# Altium PCB FSR Current-to-Voltage Converter.PcbDoc
Units mm, origin at the board's own origin, x right, y up, seen from the top; angles counter-clockwise.
Board outline 30.1 x 24.64 mm, 2 copper layers (Top Layer, Bottom Layer); 9 components, 14 nets, 50 pads, 0 vias.
Unrouted connection lines stored in the file: 1.
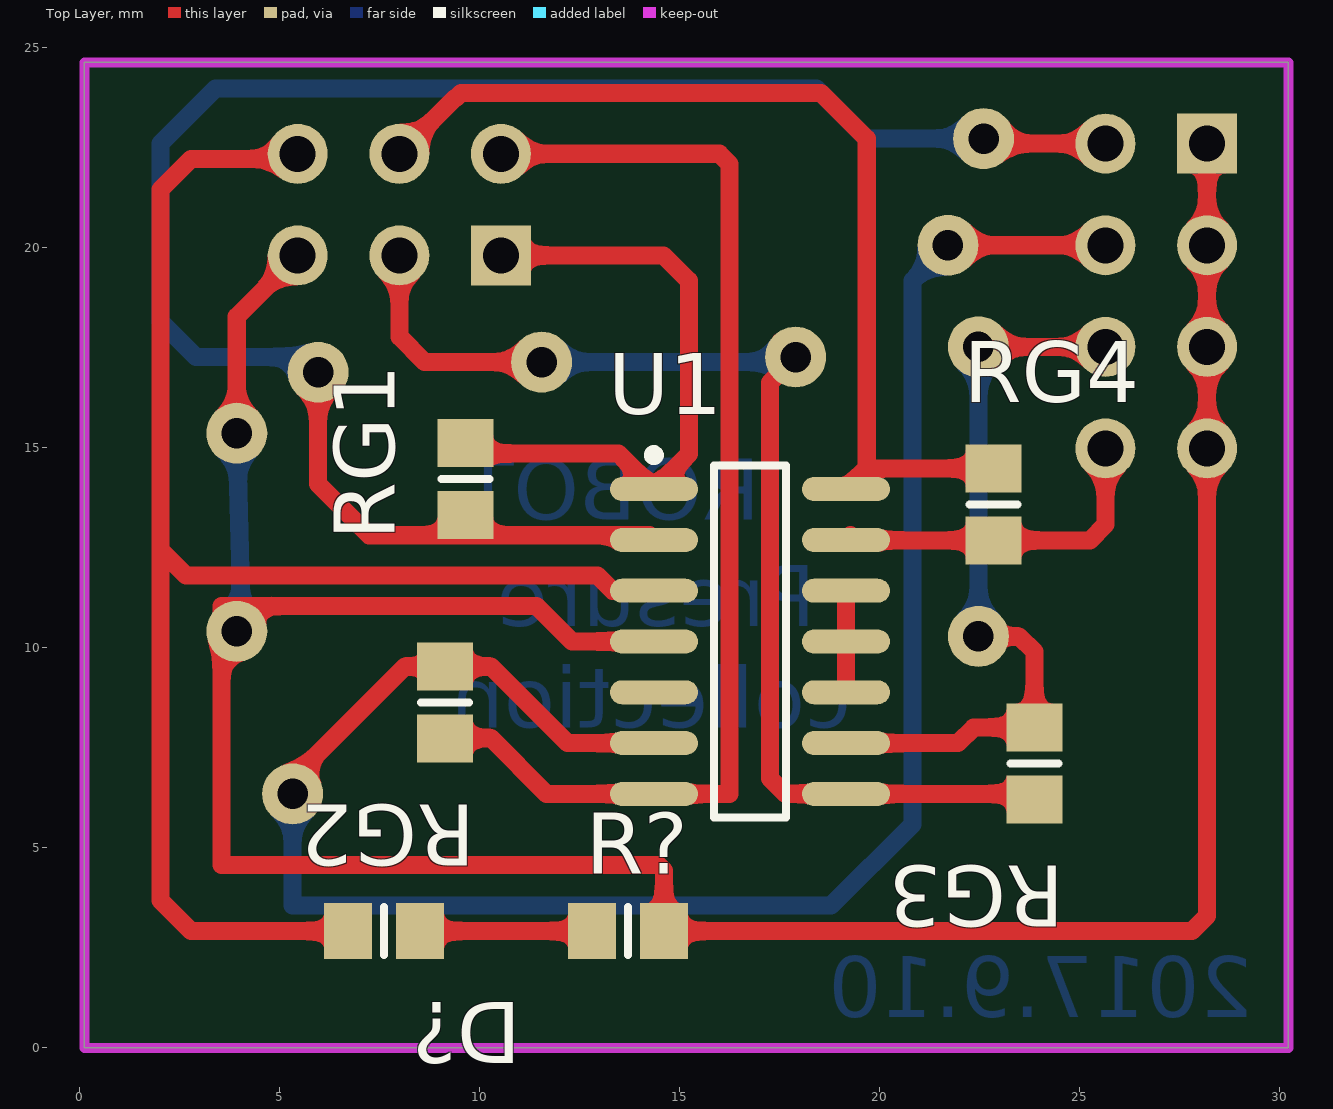
[diagram p0: Top Layer view]
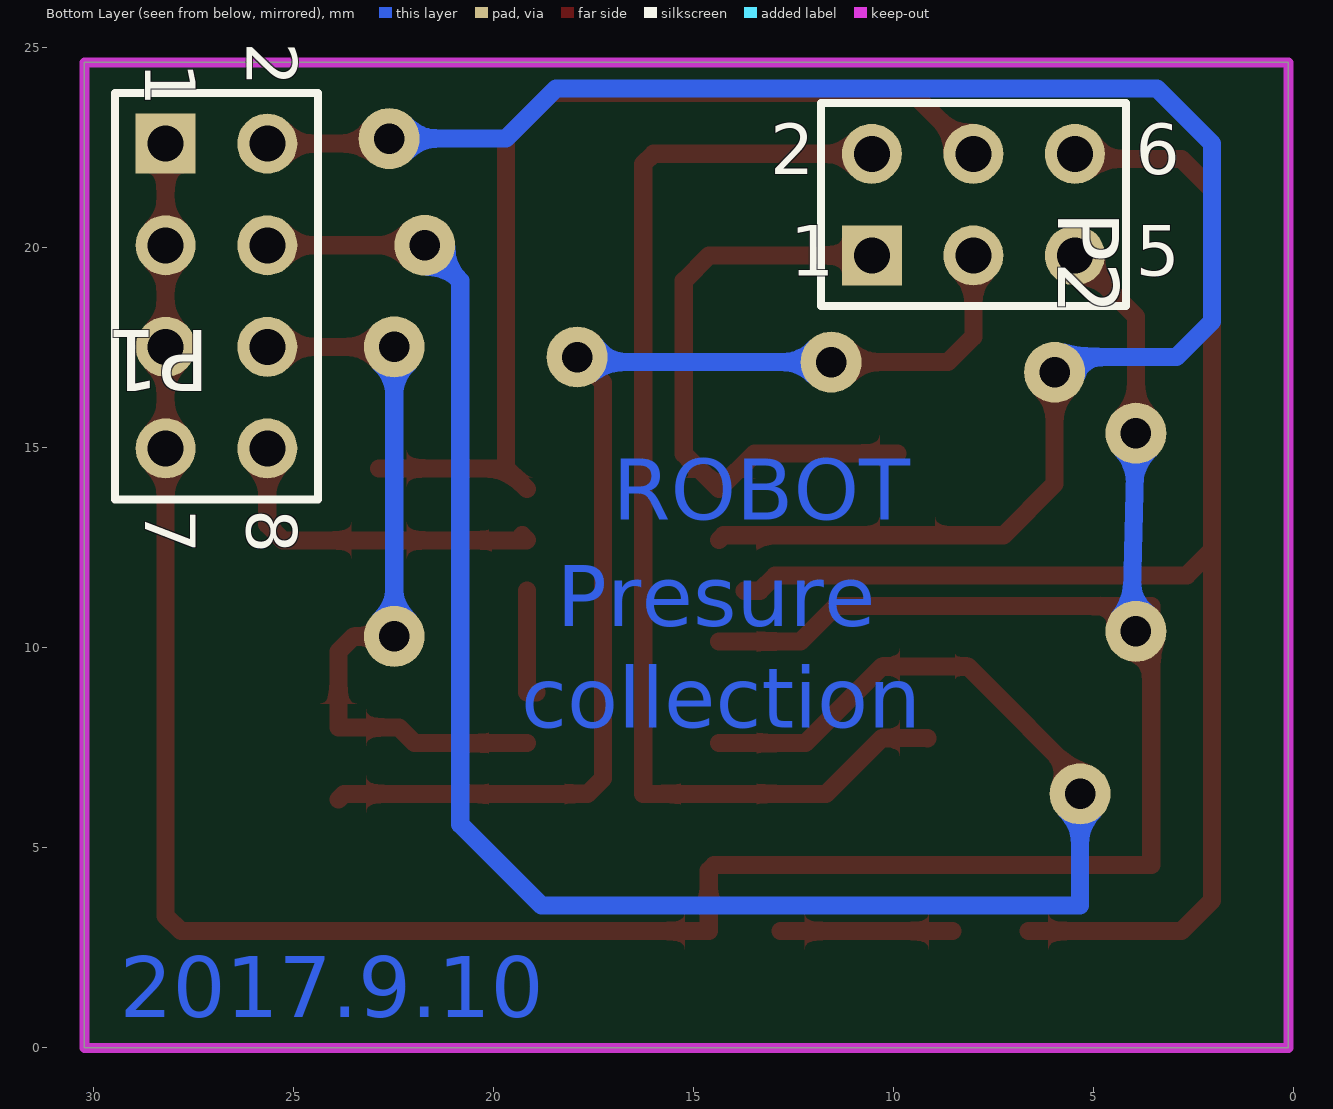
[diagram p1: Bottom Layer view, seen from below]

## Layer stack, top to bottom
Top Solder: solder mask 0.0102, Solder Resist, Dk 3.5
Top Layer: signal copper 0.0356
Dielectric1: dielectric 0.32, FR-4, Dk 4.8
Bottom Layer: signal copper 0.0356
Bottom Solder: solder mask 0.0102, Solder Resist, Dk 3.5

## Board outline
0.127,0 30.226,0 30.226,24.638 0.127,24.638

## Design rules (kind name [scope] priority, off if disabled: settings)
Clearance [All] p1: gap=0.3 ignorepadtopadclearanceinfootprint=FALSE except(0: Arc-Hole Track-Hole SMDPad-Hole THPad-Hole Via-Hole Fill-Hole Poly-Hole Region-Hole Text-Hole)
PasteMaskExpansion [All] p1: expansion=0.1
PolygonConnect [All] p1: connectstyle=Relief reliefconductorwidth=0.254 reliefentries=4 polygonreliefangle="90 Angle" airgapwidth=0.254
RoutingVias [All] p1: holewidth=0.711 width=1.27 viastyle="Through Hole" minholewidth=0.711 minwidth=1.27 maxholewidth=0.711 maxwidth=1.27
SilkToSolderMaskClearance SilkscreenOverComponentPads [IsPad] p1: minsilkscreentomaskgap=0.254 clearancetoexposedcopper=TRUE
SolderMaskExpansion [All] p1: expansion=0.216
Width [All] p1: maxlimit=0.64 minlimit=0.454 preferedwidth=0.554
28 further rules are at their usual default settings.

## Classes and differential pairs
component class "FSR Current-to-Voltage Converter": D? P1 R? RG1 RG2 RG3 RG4 U1

## Components (designator, comment, footprint, x,y, rotation, side; value= is the part's Value field where it differs from the comment)
D? "LED3" 6-0805_N 7.62,2.921 r180 top
P1 "FOOT" HDR2X4 28.194,22.606 r270 bottom
P2 "foot" HDR2X3 10.541,19.812 r180 bottom
R? "Res3" 6-0805_N 13.716,2.921 r0 top value=1K
RG1 "RES" 6-0805_N 9.652,14.224 r90 top value=4.7K
RG2 "RES" 6-0805_N 9.144,8.636 r270 top value=4.7K
RG3 "RES" 6-0805_N 23.876,7.112 r270 top value=4.7K
RG4 "RES" 6-0805_N 22.86,13.589 r90 top value=4.7K
U1 "LM324AD" SO14_N 16.764,10.16 r0 top

## Footprints (in the part's own frame and the unit in brackets; to place one, negate y for a bottom-side part, rotate by r counter-clockwise, add the part's x,y. Pads: shape width x height; smd on the part's side, far side on the other; paste and mask are expansions set on the pad)
6-0805_N [mm] "Chip Resistor, Body 2.0x1.2mm, IPC Medium Density"
  rect 1.2x1.4 smd: 1(-0.9,0) 2(0.9,0)
  silkscreen extent 0,-0.6 0,0.6, body extent -1.07,-0.7 1.07,0.7, height 0.7
HDR2X3 [mm] "Connector; Header; 3x2 Position"
  rect 1.5x1.5 hole 0.9: 1(0,0)
  round 1.5 hole 0.9: 2(0,2.54) 3(2.54,0) 4(2.54,2.54) 5(5.08,0) 6(5.08,2.54)
  silkscreen extent -1.27,-1.27 6.35,3.81
HDR2X4 [mm] "Connector; Header; 4x2 Position"
  rect 1.5x1.5 hole 0.9: 1(0,0)
  round 1.5 hole 0.9: 2(0,2.54) 3(2.54,0) 4(2.54,2.54) 5(5.08,0) 6(5.08,2.54) 7(7.62,0) 8(7.62,2.54)
  silkscreen extent -1.27,-1.27 8.89,3.81
SO14_N [mm] "SOIC, 14-Leads, Body 8.7x3.9mm, Pitch 1.27mm, IPC Medium Density"
  oval 2.2x0.6 smd: 1(-2.4,3.81) 2(-2.4,2.54) 3(-2.4,1.27) 4(-2.4,0) 5(-2.4,-1.27) 6(-2.4,-2.54) 7(-2.4,-3.81) 8(2.4,-3.81) 9(2.4,-2.54) 10(2.4,-1.27) 11(2.4,0) 12(2.4,1.27) 13(2.4,2.54) 14(2.4,3.81)
  silkscreen extent -2.52,-4.4 0.9,4.78, body extent -1.95,-4.33 1.95,4.33, height 1.75

## Part data
D?: "Typical BLUE SiC LED", DatasheetVersion=16-Apr-2002, LatestRevisionDate=17-Dec-2003, LatestRevisionNote="PCB Footprint replaced.", PackageReference=3.5X2.8X1.9, PackageVersion=16-Apr-2002, Published=8-Jun-2000, Publisher="Altium Limited"
P1: library part "Header 4X2", "Header, 4-Pin, Dual row", LatestRevisionDate=17-Jul-2002, LatestRevisionNote="Re-released for DXP Platform.", Publisher="Altium Limited"
P2: library part "Header 3X2", "Header, 3-Pin, Dual row", LatestRevisionDate=17-Jul-2002, LatestRevisionNote="Re-released for DXP Platform.", Publisher="Altium Limited"
R?: "Resistor", LatestRevisionDate=29-May-2009, LatestRevisionNote="IPC-7351 Footprint Added.", PackageDescription="Chip Resistor", PackageReference=J1-0603, Published=8-Jun-2000, Publisher="Altium Limited"
RG1 RG2 RG3 RG4: library part Res3, "Resistor", LatestRevisionDate=29-May-2009, LatestRevisionNote="IPC-7351 Footprint Added.", PackageDescription="Chip Resistor", PackageReference=J1-0603, Published=8-Jun-2000, Publisher="Altium Limited"
U1: "Low-Power Quad Operational Amplifier", Code_IPC=SOIC127P600-14, ComponentLink1Description="Manufacturer Link", ComponentLink1URL=http://www.st.com/, ComponentLink2Description=Datasheet, ComponentLink2URL=http://www.st.com/stonline/products/literature/ds/4797/lm224a.pdf, DatasheetVersion=Nov-1997, LatestRevisionDate=13-Apr-2006, LatestRevisionNote="IPC-7351 Footprint Added.", PackageDescription="14-Pin Small Outline Integrated Circuit 1.27 mm Pitch", PackageReference=SO14, PackageVersion=Sep-1998, Published=24-Aug-2001, Publisher="Altium Limited"

## Free pads (board coordinates)
  round 1.524 hole 0.762: 2(11.557,17.145) 3(17.907,17.272) 4(22.479,17.526) 5(22.479,10.287) 6(3.937,15.367) 7(3.937,10.414) 8(5.334,6.35) 9(21.717,20.066) 10(22.606,22.733) 12(5.969,16.891)

## Nets (pads, with @x,y where several pads share a name; then routed paths per layer and width w, separated by ;. In a path a pad name is that pad's centre, name@x,y a point inside that pad or via, vN(x,y) a via of type N, cw(c..) or ccw(c..) an arc to the next point about the centre after c; other vN are vias at no path point)
FOOT_1: P1.2 pad.10 pad.12 RG1.1 U1.2 | length 44.5
  Top Layer w0.454: pad.12 5.969,14.097 7.25,12.816 14.248,12.816 U1.2 ; pad.10@22.86,22.606 P1.2
  Bottom Layer w0.454: pad.12@5.461,17.272 2.921,17.272 2.032,18.161 2.032,22.606 3.41,23.984 18.434,23.984 19.685,22.733 pad.10
FOOT_2: P1.4 pad.8 pad.9 RG2.1 U1.6 | length 49.3
  Top Layer w0.454: pad.8@5.08,6.477 8.139,9.536 RG2.1 10.287,9.536 12.203,7.62 U1.6 ; pad.9 P1.4
  Bottom Layer w0.454: pad.8 5.334,3.556 18.796,3.556 20.828,5.588 20.828,19.177 pad.9
FOOT_3: P1.6 pad.4 pad.5 RG3.1 U1.9 | length 18.4
  Top Layer w0.454: U1.9 21.971,7.62 22.363,8.012 RG3.1 23.876,9.906 23.495,10.287 pad.5 ; pad.4 P1.6
  Bottom Layer w0.454: pad.5@22.479,10.668 pad.4
FOOT_4: P1.8 RG4.1 U1.13 | length 8.7
  Top Layer w0.454: U1.13@19.28,12.816 U1.13 19.175,12.689 RG4.1 25.262,12.689 25.654,13.081 P1.8
GND: D?.2 P2.6 U1.3 | length 38.5
  Top Layer w0.454: 2.095,12.383 2.667,11.811 12.954,11.811 13.335,11.43 U1.3@13.716,11.43 ; P2.6@5.334,22.225 2.794,22.225 2.032,21.463 2.032,3.683 2.794,2.921 D?.2@6.62,2.921
  Top Layer w0.554: P2.6@5.334,22.225 P2.6
NetD?_1: D?.1 R?.1 | length 4.3
  Top Layer w0.454: D?.1 R?.1
NetU1_5: U1.5
NetU1_10: U1.10 U1.11 | length 0.2
  Top Layer w0.454: U1.10@18.925,8.89 U1.10
NetU1_11: U1.12 | length 2.5
  Top Layer w0.454: 19.164,8.89 U1.12
SENSER_1: P2.1 RG1.2 U1.1 | length 15.4
  Top Layer w0.454: RG1.2@9.895,14.859 13.475,14.859 U1.1 15.24,14.846 15.24,19.177 14.605,19.812 P2.1
SENSER_2: P2.2 RG2.2 U1.7 | length 29.3
  Top Layer w0.454: RG2.2 9.155,7.747 10.287,7.747 11.684,6.35 U1.7 16.256,6.35 16.256,22.098 16.002,22.352 P2.2
SENSER_3: P2.3 pad.2 pad.3 RG3.2 U1.8 | length 30.4
  Top Layer w0.454: P2.3 8.001,17.78 8.636,17.145 pad.2 ; pad.3@17.526,17.653 pad.3 17.264,16.629 17.264,6.739 17.653,6.35 U1.8 23.738,6.35 RG3.2
  Bottom Layer w0.454: pad.2 17.78,17.145 pad.3
SENSER_4: P2.4 RG4.2 U1.14 | length 24.9
  Top Layer w0.454: P2.4 9.398,23.749 9.417,23.749 9.544,23.876 18.542,23.876 19.685,22.733 19.685,14.491 19.683,14.489 ; U1.14 19.683,14.489 ; RG4.2 19.683,14.489
VCC: P1.1 P1.3 P1.5 P1.7 P2.5 pad.6 pad.7 R?.2 U1.4 | length 73.4
  Top Layer w0.454: pad.6 3.937,18.288 P2.5 ; U1.4 12.319,10.16 11.43,11.049 3.556,11.049 3.556,4.572 14.478,4.572 14.616,4.434 R?.2 27.813,2.921 28.194,3.302 P1.7 P1.5 P1.3 P1.1
  Bottom Layer w0.454: pad.6 4.064,10.417 pad.7@4.064,10.414

## Keep-outs
Keep-Out Layer:
  the board outline again, w0.254

## Other copper
Bottom Layer:
  text "ROBOT" at 17.018,13.208 h1.52
  text "Presure" at 18.415,10.541 h1.52
  text "collection" at 19.304,8.001 h1.52
  text "2017.9.10" at 29.337,0.762 h1.52

## Text inside footprints (layer, text, board x,y; h text height)
P1: Bottom Overlay "8" at 26.162,13.462 h1.27 r90; Bottom Overlay "7" at 28.702,13.462 h1.27 r90; Bottom Overlay "1" at 28.702,24.638 h1.27 r90; Bottom Overlay "2" at 26.162,25.146 h1.27 r90
P2: Bottom Overlay "1" at 12.573,19.304 h1.27; Bottom Overlay "2" at 13.081,21.844 h1.27; Bottom Overlay "5" at 3.937,19.304 h1.27; Bottom Overlay "6" at 3.937,21.844 h1.27